# Altium PCB FLS ADC_A.PcbDoc (part 1 of 2)
Units mil, origin at the board's own origin, x right, y up, seen from the top; angles counter-clockwise.
Board outline 3421.65 x 2339.32 mil, 6 copper layers (Top Layer, Internal Plane 1, Mid-Layer 1, Mid-Layer 2, Internal Plane 2, Bottom Layer), stack 56.9 mil thick; 63 components, 71 nets, 345 pads, 98 vias.
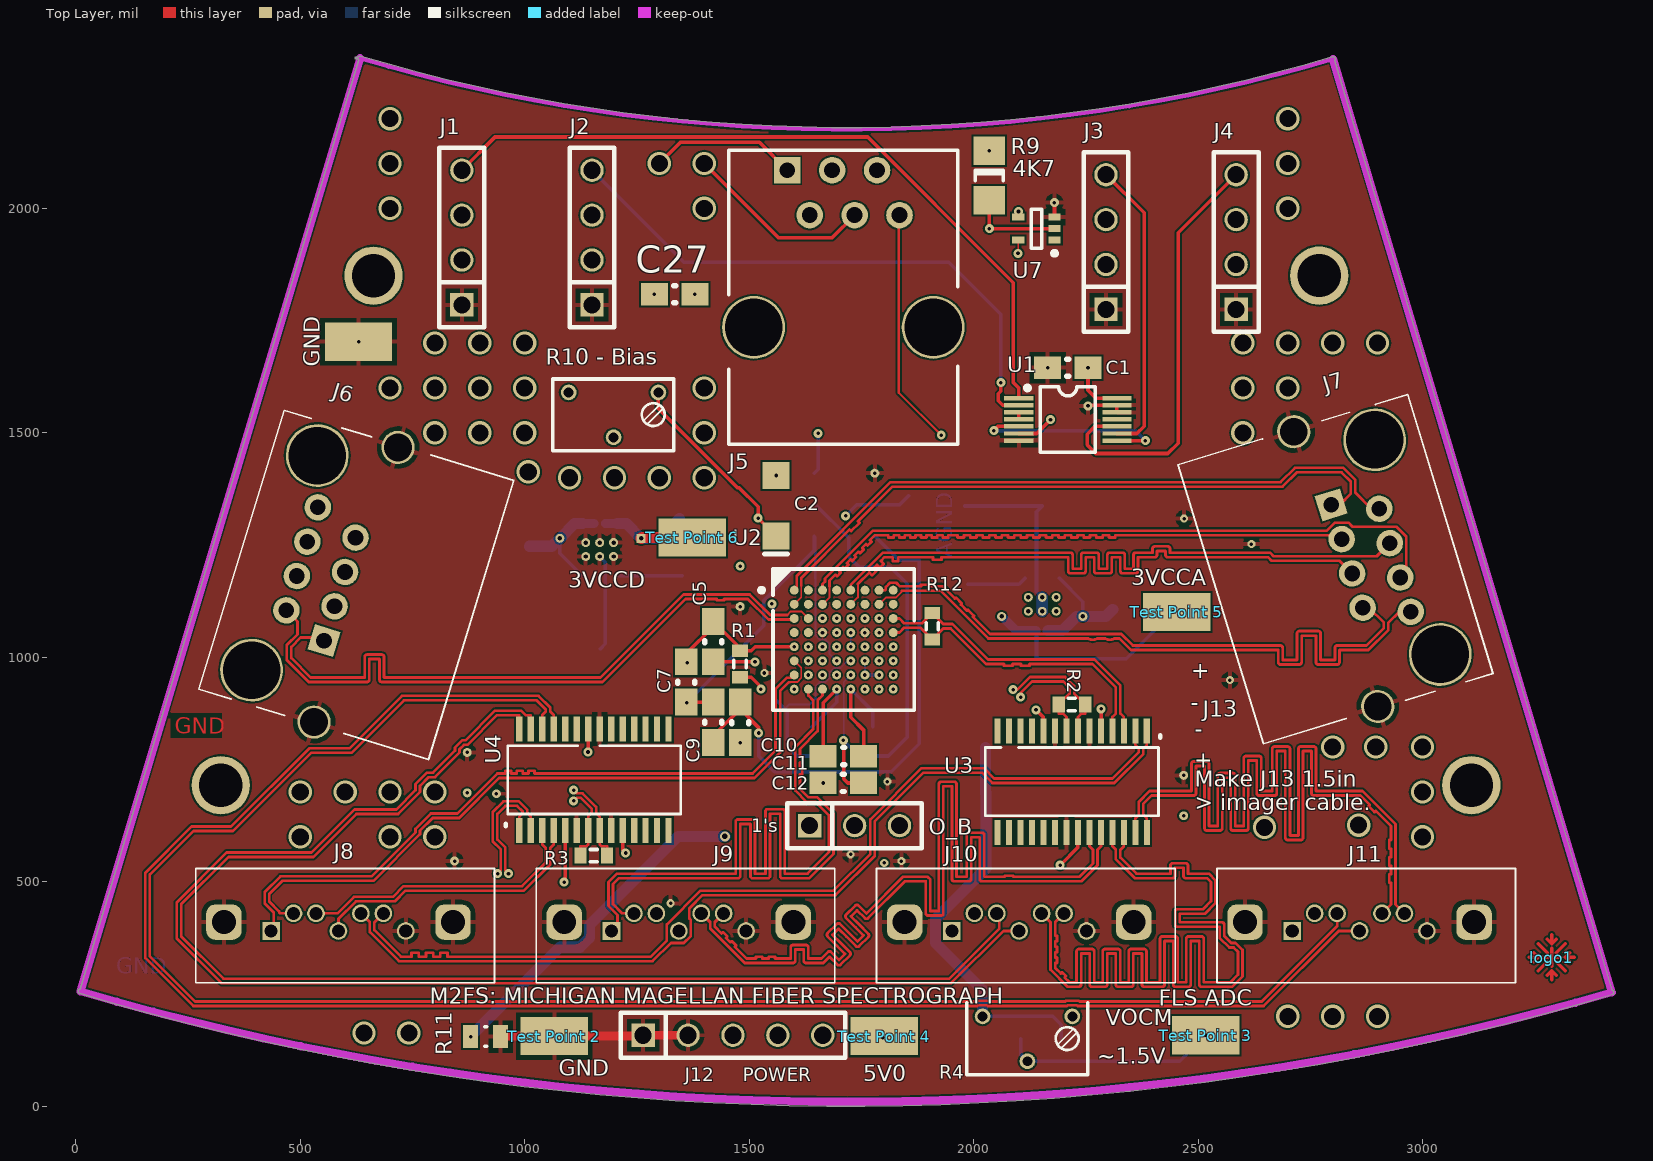
[diagram p0: Top Layer view]
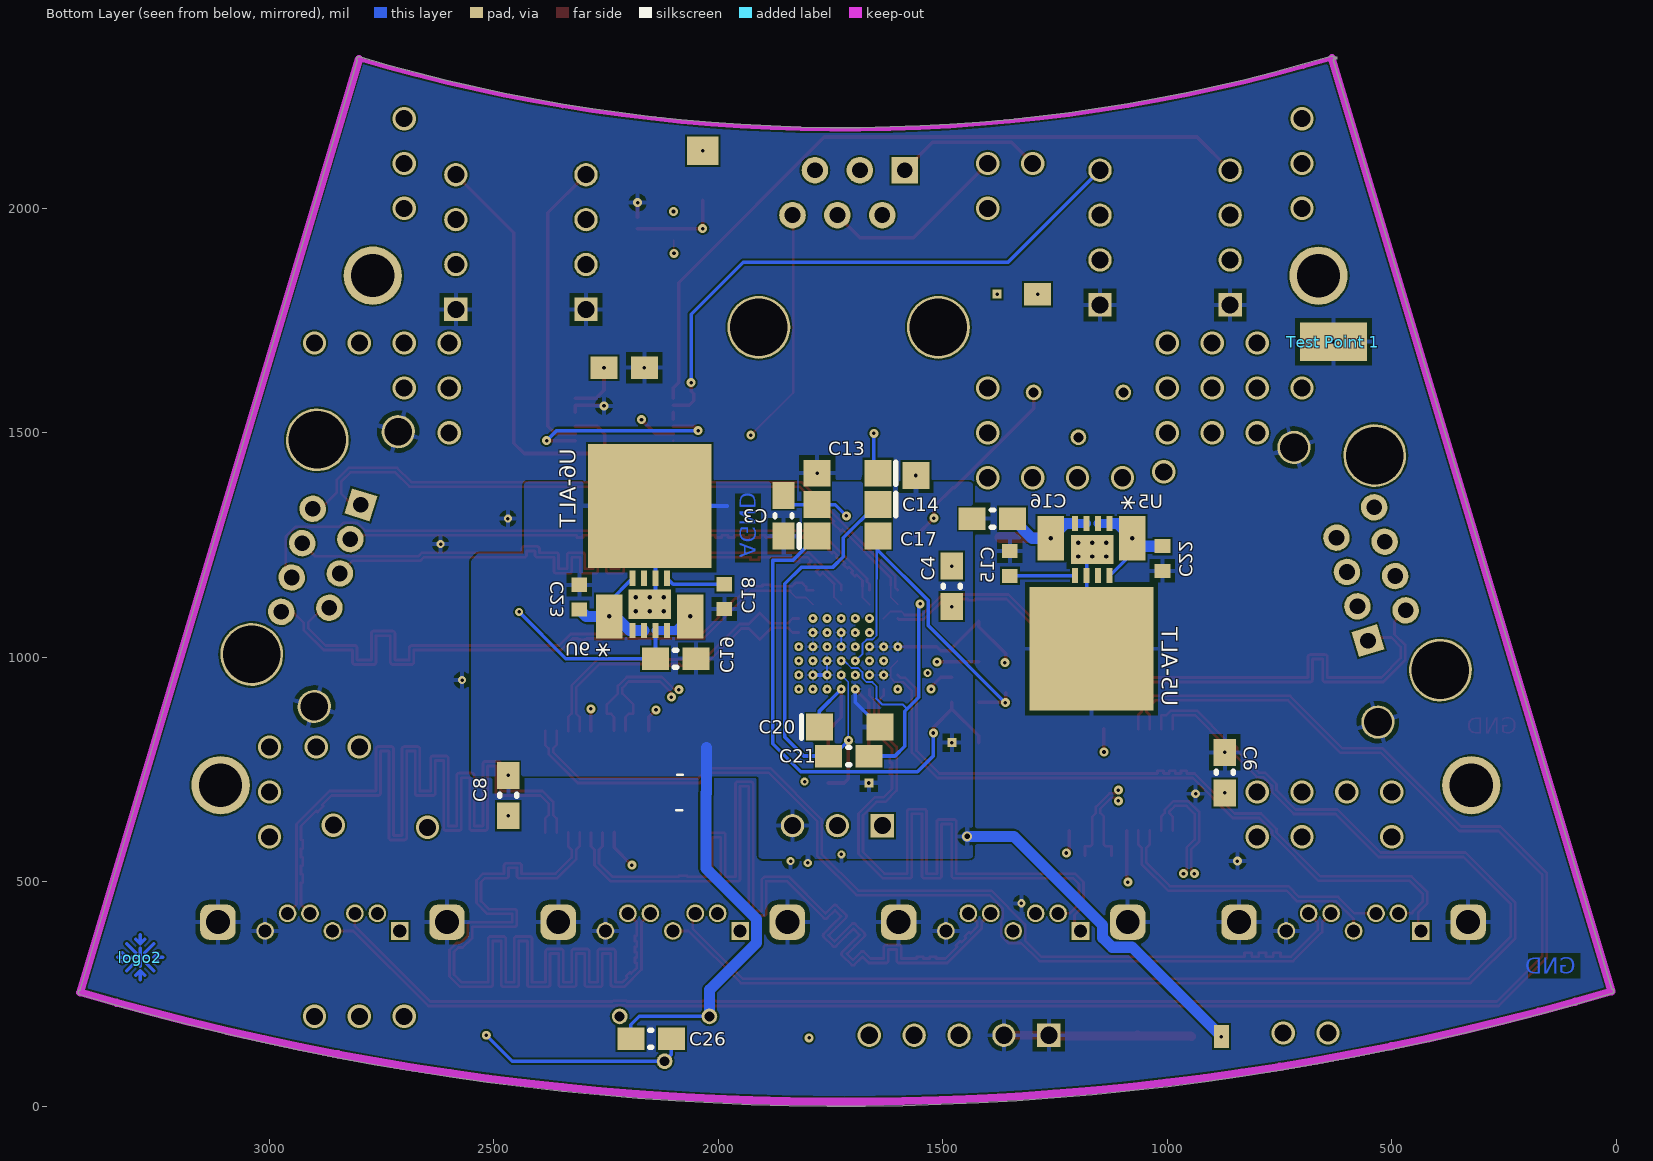
[diagram p1: Bottom Layer view, seen from below]
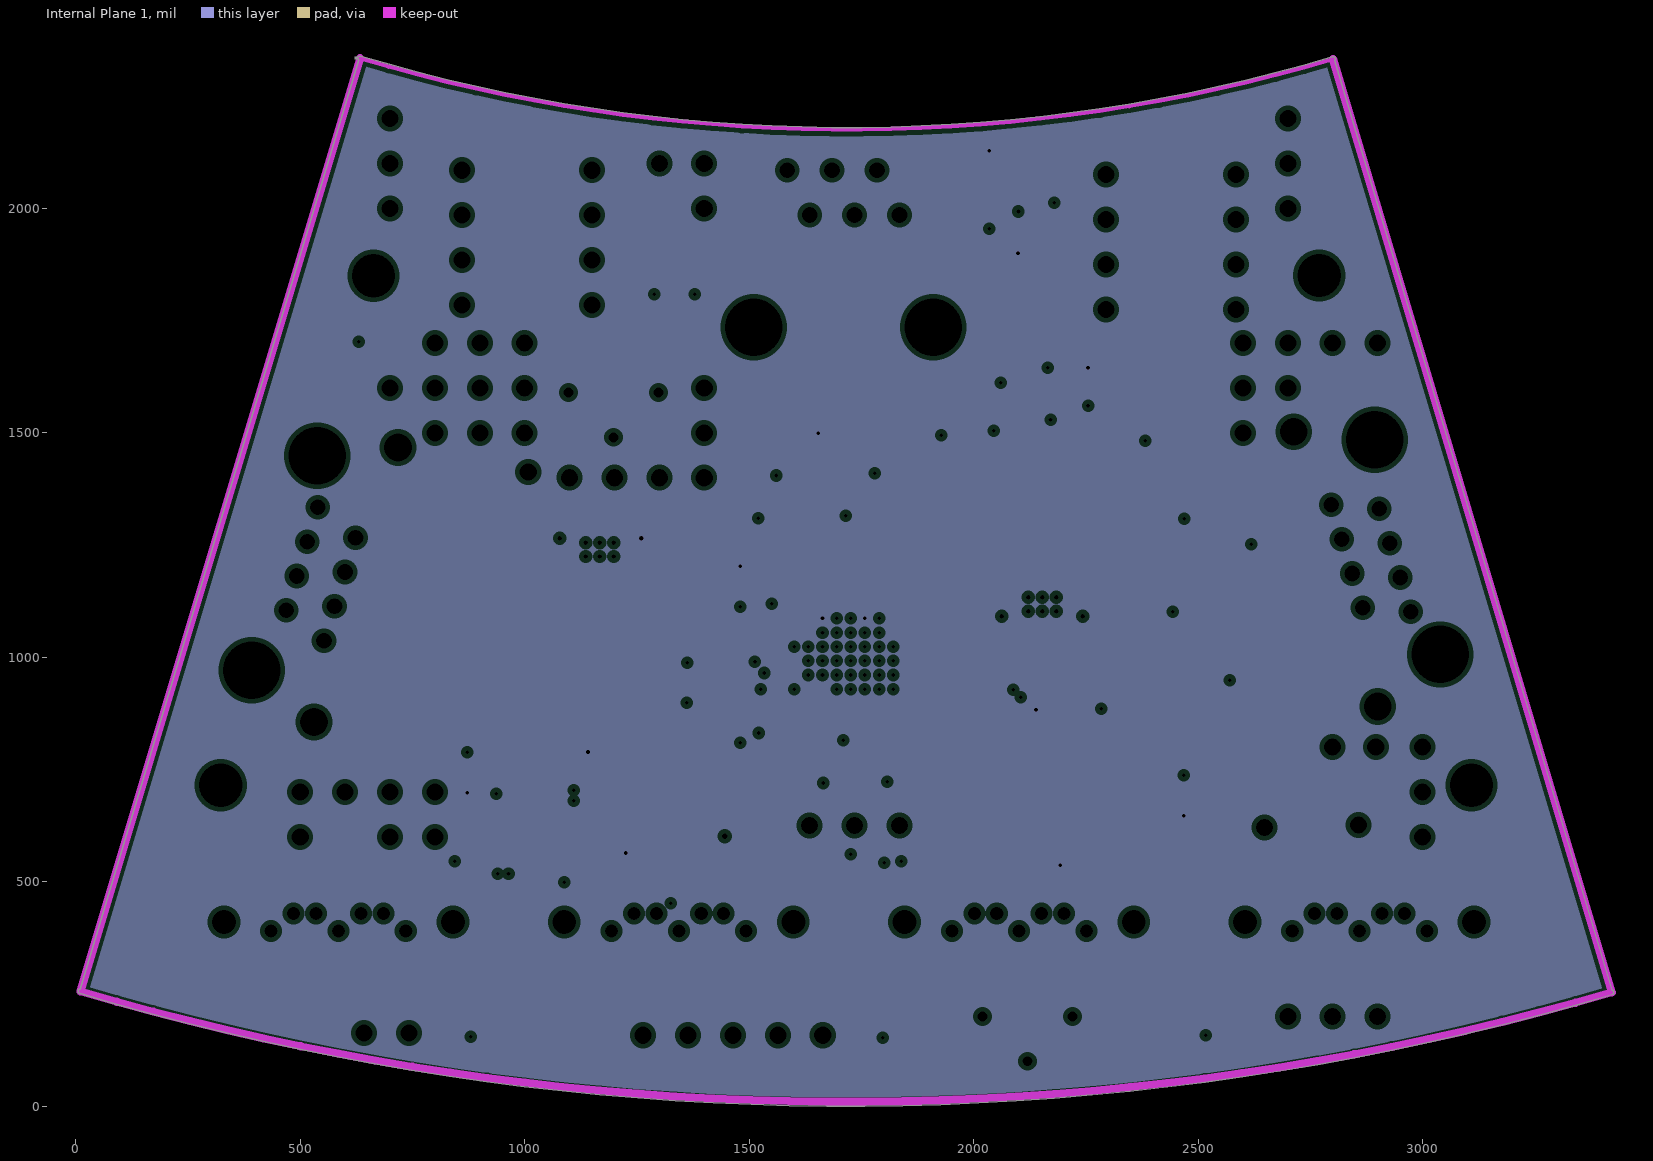
[diagram p2: Internal Plane 1, clearances drawn from the general rule]
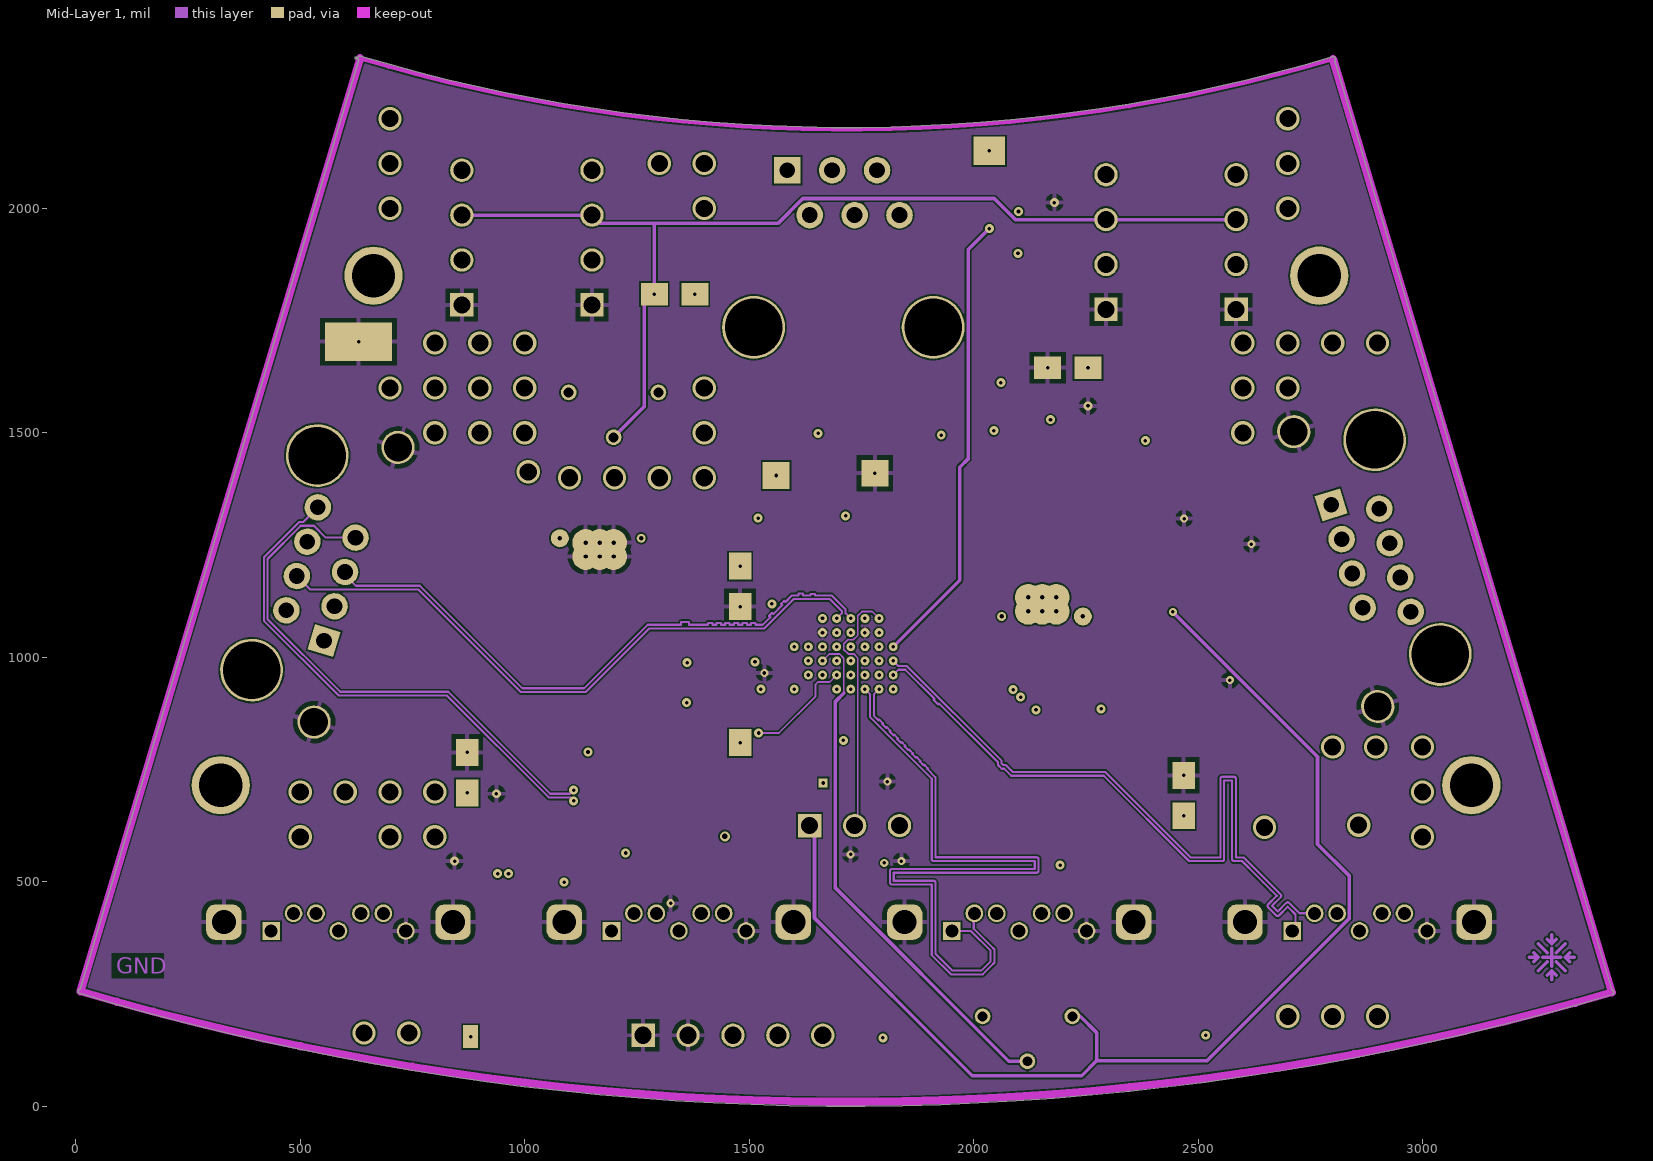
[diagram p3: Mid-Layer 1]
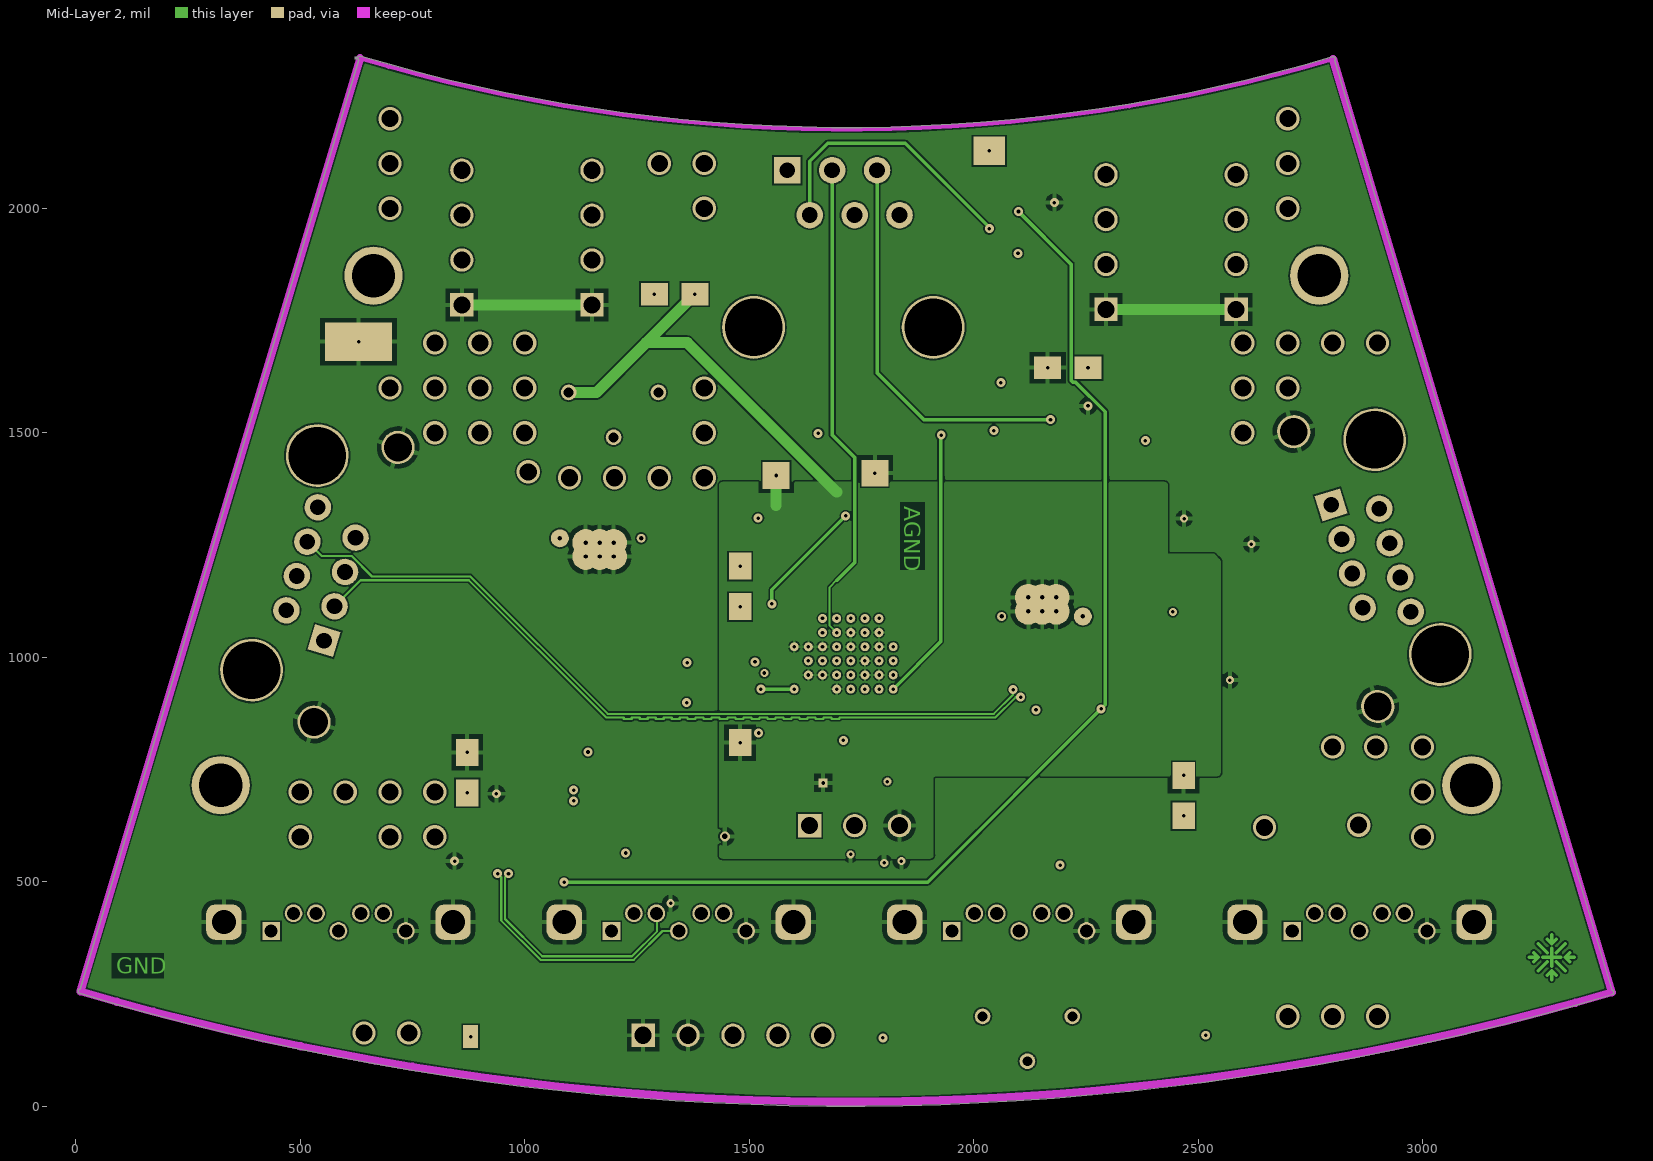
[diagram p4: Mid-Layer 2]
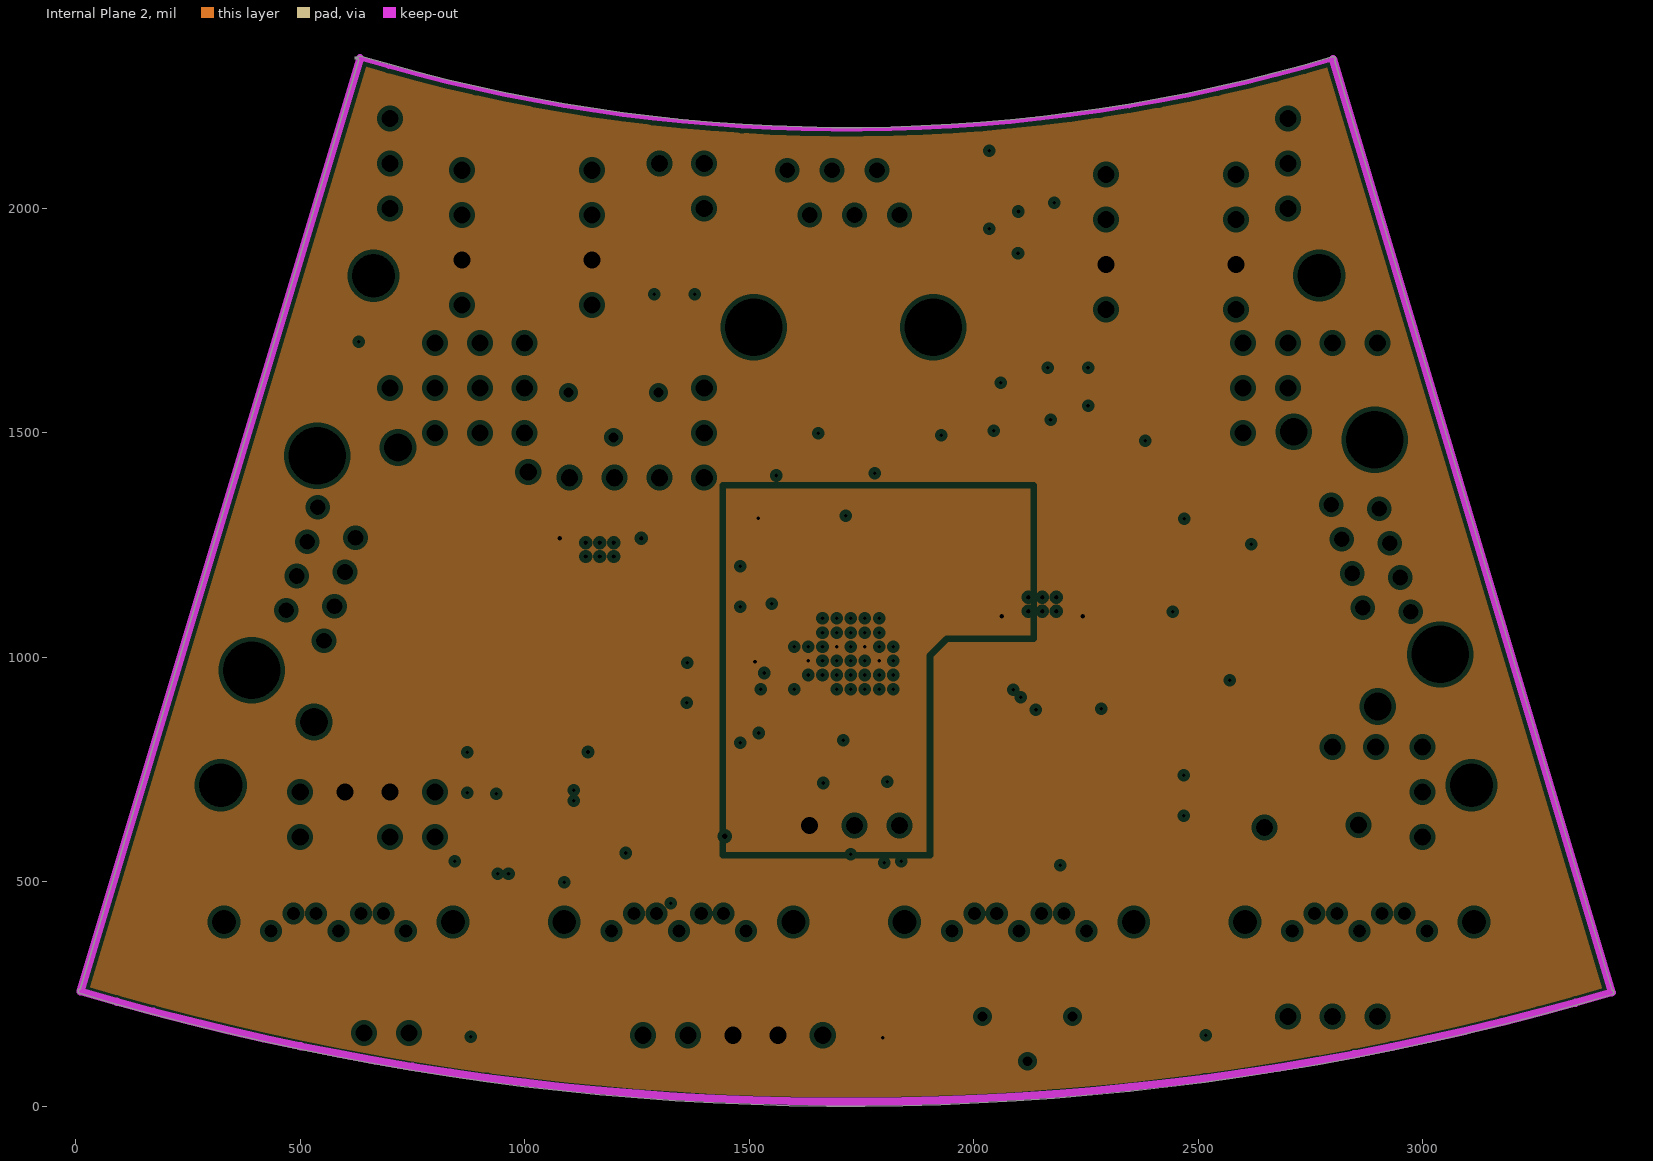
[diagram p5: Internal Plane 2, clearances drawn from the general rule]

## Layer stack, top to bottom
Top Layer: signal copper 1.4
Dielectric: prepreg 8.1, 2116 and 3313, Dk 4.2
Internal Plane 1: plane copper 0.7, net 3VCCD
Dielectric: core 13, FR-4, Dk 4.2
Mid-Layer 1: signal copper 0.7
Dielectric: prepreg 9.1, 2116, Dk 4.2
Mid-Layer 2: signal copper 0.7
Dielectric: core 13, FR-4, Dk 4.2
Internal Plane 2: plane copper 0.7, net (Multiple Nets)
Dielectric: prepreg 8.1, 2116 and 3313, Dk 4.2
Bottom Layer: signal copper 1.4

## Board outline
8.56,251.13 cw(c10,255.93) 9.71,260.94 630.24,2330.64 cw(c633.54,2334.42) 628.73,2333.02 624.13,2333.02 cw(c624.13,2335) 624.13,2336.98 629.24,2336.98 cw(c633.54,2334.42) 634.99,2339.22 ccw(c1719.72,5955) 2799.5,2337.74 cw(c2800.93,2332.93) 2805.95,2332.93 cw(c2800.93,2332.93) 2804.15,2329.09 3422.21,258.58 cw(c3421.63,253.6) 3426.65,253.6 cw(c3421.63,253.6) 3423.07,248.79 cw(c1719.72,5955)

## Design rules (kind name [scope] priority, off if disabled: settings)
AssemblyTestpoint [(IsPad And (OnTopLayer Or OnBottomLayer)) Or (IsVia) Or (IsPad And OnMultiLayer)] p1: testpointundercomponent=TRUE minsize=10 maxsize=100 preferedsize=60 minholesize=0 maxholesize=40 preferedholesize=32 testpointgrid=1 usegrid=TRUE gridtolerance=0.01 allowsidetop=TRUE allowsidebottom=TRUE
Clearance Clearance_1 [InComponent('U2')] p1: gap=3.5
Clearance Clearance_3 [OnLayer('Top Layer') or OnLayer('Bottom Layer')] p2: gap=4
Clearance [All] p3: gap=3.5
ComponentClearance [All vs InNet('FooBar')] p1: gap=10 collisioncheckmode=3 verticalgap=10 showdistances=FALSE
DiffPairsRouting [All] p1: maxlimit=10 minlimit=3.5 mostfreqgap=4 toplayer_mingap=4 midlayer1_prefgap=3.5 midlayer2_prefgap=3.5 bottomlayer_mingap=4 maxuncoupledlength=100
FabricationTestpoint [(IsPad And (OnTopLayer Or OnBottomLayer)) Or (IsVia) Or (IsPad And OnMultiLayer)] p1: side=3 testpointundercomponent=TRUE minsize=10 maxsize=100 preferedsize=60 minholesize=0 maxholesize=40 preferedholesize=32 testpointgrid=1 allowsidetop=TRUE allowsidebottom=TRUE usegrid=TRUE gridtolerance=0.01
HoleSize [All] p1: absolutevalues=TRUE maxlimit=150 minlimit=6 maxpercent=80.000 minpercent=20.000
HoleToHoleClearance [All] p1: gap=6 allowstackedmicrovias=TRUE
MatchedLengths MatchedLengths_2 [InNetClass('Match Lengths 2')] p1: tolerance=3 checknetsindiffpair=TRUE checkdiffpairvsdiffpair=TRUE checkothers=FALSE
MatchedLengths MatchedLengths_1 [InNetClass('Match Lengths 1')] p2: tolerance=10 checknetsindiffpair=TRUE checkdiffpairvsdiffpair=TRUE checkothers=FALSE
MatchedLengths [InNetClass('Match Lengths')] p3: tolerance=10 checknetsindiffpair=TRUE checkdiffpairvsdiffpair=TRUE checkothers=FALSE
MaximumViaCount [InNetClass('Differential')] p1: limit=1
MinimumAnnularRing [All] p1: minimumring=3
MinimumSolderMaskSliver [All] p1: minsoldermaskwidth=0.5
PlaneClearance [All] p1: clearance=10
PlaneConnect PlaneConnect_VCCD [(InNet('3VCCD') AND InComponent('U5'))] p1: planeconnectstyle=Relief reliefexpansion=8 reliefentries=4 reliefconductorwidth=6 reliefairgap=8
PlaneConnect PlaneConnect_3VCCA_U6 [(InNet('3VCCA') AND InComponent('U6'))] p2: planeconnectstyle=Relief reliefexpansion=8 reliefentries=4 reliefconductorwidth=6 reliefairgap=8
PlaneConnect PlaneConnect_U2 [HasFootprint('BGA80P8X8-64B')] p3: planeconnectstyle=Relief reliefexpansion=3 reliefentries=4 reliefconductorwidth=4 reliefairgap=3
PlaneConnect PlaneConnect_3VCCD [(InNet('3VCCD') AND HasFootprint('BGA80P8X8-64B'))] p4: planeconnectstyle=Relief reliefexpansion=2 reliefentries=4 reliefconductorwidth=4 reliefairgap=6
PlaneConnect "PlaneConnect General" [All] p5: planeconnectstyle=Relief reliefexpansion=20 reliefentries=4 reliefconductorwidth=10 reliefairgap=10
PolygonConnect PolygonConnect_BGA [HasFootprint('BGA80P8X8-64B')] p1: connectstyle=Relief reliefconductorwidth=6 reliefentries=4 polygonreliefangle="90 Angle" airgapwidth=3.2
PolygonConnect [All] p2: connectstyle=Relief reliefconductorwidth=10 reliefentries=4 polygonreliefangle="90 Angle" airgapwidth=10
RoutingVias [All] p1: holewidth=8 width=20 viastyle="Through Hole" minholewidth=8 minwidth=20 maxholewidth=28 maxwidth=50
ShortCircuit ShortCircuit_1 [InNet('AGND') vs InNet('GND')] p1: allowed=TRUE
SilkToSilkClearance [All] p1: silktosilkclearance=1
SilkscreenOverComponentPads [All] p1: minsilkscreentomaskgap=0.5
SolderMaskExpansion [All] p1: expansion=2
ViasUnderSMD [All] p1: allowed=TRUE
Width "Differential Width" [InNetClass('Differential')] p1: maxlimit=7 minlimit=3.5 preferedwidth=6.05 toplayer_minwidth=4 midlayer1_prefwidth=4.8 midlayer2_prefwidth=4.8 bottomlayer_minwidth=4 minimp=50.000000 maximp=85.000000 favimp=50.000000
Width [All] p2: maxlimit=50 minlimit=3.5 preferedwidth=5
16 further rules are at their usual default settings.

## Classes and differential pairs
component class "FLS ADC_ A": 1's C1 C2 C3 C4 C5 C7 C9 C10 C11 C12 C13 C14 C17 C20 C21 C26 C27 DSEL J1 J2 J3 J4 J5 J6 J7 J8 J9 J10 J11 logo1 logo2 R1 R2 R3 R4 R9 R10 R11 "Test Point 1" "Test Point 2" "Test Point 3" "Test Point 4" "Test Point 5" "Test Point 6" U1 U2 U7
component class PP1: C15 C16 C18 C19 C22 C23 J12 U5 U5-ALT U6 U6-ALT
component class MAX9153: C8 U4
net class Differential: DATA_CLK_OUT_A_N DATA_CLK_OUT_A_P FRAME_CLK_OUT_A_N FRAME_CLK_OUT_A_P LVDS_CHANNEL_1_N LVDS_CHANNEL_1_P LVDS_CHANNEL_2_N LVDS_CHANNEL_2_P LVDS_CHANNEL_3_N LVDS_CHANNEL_3_P LVDS_CHANNEL_4_N LVDS_CHANNEL_4_P START_A1_N START_A1_P START_A2_N START_A2_P START_A3_N START_A3_P START_A4_N START_A4_P START_A_N START_A_P SYS_CLK_A1_N SYS_CLK_A1_P SYS_CLK_A2_N SYS_CLK_A2_P SYS_CLK_A3_N SYS_CLK_A3_P SYS_CLK_A4_N SYS_CLK_A4_P SYS_CLK_A_N SYS_CLK_A_P SYS_CLK_ADC_A_N SYS_CLK_ADC_A_P "VIDEO A1_N" "VIDEO A1_P" "VIDEO A2_N" "VIDEO A2_P" "VIDEO A3_N" "VIDEO A3_P" "VIDEO A4_N" "VIDEO A4_P"
net class "Match Lengths": DATA_CLK_OUT_A_N DATA_CLK_OUT_A_P FRAME_CLK_OUT_A_N FRAME_CLK_OUT_A_P LVDS_CHANNEL_1_N LVDS_CHANNEL_1_P LVDS_CHANNEL_2_N LVDS_CHANNEL_2_P LVDS_CHANNEL_3_N LVDS_CHANNEL_3_P LVDS_CHANNEL_4_N LVDS_CHANNEL_4_P
net class "Match Lengths 2": "VIDEO A1_N" "VIDEO A1_P" "VIDEO A2_N" "VIDEO A2_P" "VIDEO A3_N" "VIDEO A3_P" "VIDEO A4_N" "VIDEO A4_P"
net class "Match Lengths 1": SYS_CLK_A1_N SYS_CLK_A1_P SYS_CLK_A2_N SYS_CLK_A2_P SYS_CLK_A3_N SYS_CLK_A3_P SYS_CLK_A4_N SYS_CLK_A4_P SYS_CLK_ADC_A_N SYS_CLK_ADC_A_P
differential pair class LVDS: DATA_CLK_OUT_A FRAME_CLK_OUT_A LVDS_CHANNEL_1 LVDS_CHANNEL_2 LVDS_CHANNEL_3 LVDS_CHANNEL_4
differential pair class VIDEO: "VIDEO A1" "VIDEO A2" "VIDEO A3" "VIDEO A4"
differential pair class CLOCK: SYS_CLK_A1 SYS_CLK_A2 SYS_CLK_A3 SYS_CLK_A4 SYS_CLK_ADC_A
differential pair "VIDEO A4": +"VIDEO A4_P" -"VIDEO A4_N"
differential pair "VIDEO A3": +"VIDEO A3_P" -"VIDEO A3_N"
differential pair "VIDEO A2": +"VIDEO A2_P" -"VIDEO A2_N"
differential pair "VIDEO A1": +"VIDEO A1_P" -"VIDEO A1_N"
differential pair SYS_CLK_A: +SYS_CLK_A_P -SYS_CLK_A_N
differential pair SYS_CLK_ADC_A: +SYS_CLK_ADC_A_P -SYS_CLK_ADC_A_N
differential pair SYS_CLK_A4: +SYS_CLK_A4_P -SYS_CLK_A4_N
differential pair SYS_CLK_A3: +SYS_CLK_A3_P -SYS_CLK_A3_N
differential pair SYS_CLK_A2: +SYS_CLK_A2_P -SYS_CLK_A2_N
differential pair SYS_CLK_A1: +SYS_CLK_A1_P -SYS_CLK_A1_N
differential pair START_A: +START_A_P -START_A_N
differential pair START_A4: +START_A4_P -START_A4_N
differential pair START_A3: +START_A3_P -START_A3_N
differential pair START_A2: +START_A2_P -START_A2_N
differential pair START_A1: +START_A1_P -START_A1_N
differential pair LVDS_CHANNEL_4: +LVDS_CHANNEL_4_P -LVDS_CHANNEL_4_N
differential pair LVDS_CHANNEL_3: +LVDS_CHANNEL_3_P -LVDS_CHANNEL_3_N
differential pair LVDS_CHANNEL_2: +LVDS_CHANNEL_2_P -LVDS_CHANNEL_2_N
differential pair LVDS_CHANNEL_1: +LVDS_CHANNEL_1_P -LVDS_CHANNEL_1_N
differential pair FRAME_CLK_OUT_A: +FRAME_CLK_OUT_A_P -FRAME_CLK_OUT_A_N
differential pair DATA_CLK_OUT_A: +DATA_CLK_OUT_A_P -DATA_CLK_OUT_A_N

## Components (designator, comment, footprint, x,y, rotation, side; value= is the part's Value field where it differs from the comment)
1's "SW-SPDT" SIP3 1635,625 r0 top locked
C1 "0.1uF" "0805 slim"#1 2165,1645 r0 top locked
C2 "10uF" 1206#1 1560,1270 r90 top locked
C3 "0.1uF" "0805 slim"#2 1855,1360 r270 bottom locked
C4 "0.1uF" "0805 slim"#3 1480,1203 r270 bottom locked
C5 "0.1uF" "0805 slim"#2 1420,990 r90 top locked
C6 "0.1uF" "0805 slim"#3 872,788 r270 bottom
C7 "0.1uF" "0805 slim"#2 1360,900 r90 top locked
C8 "0.1uF" "0805 slim"#3 2468,737 r270 bottom
C9 "0.1uF" "0805 slim"#2 1420,900 r270 top locked
C10 "0.1uF" "0805 slim"#4 1480,810 r90 top locked
C11 "0.1uF" "0805 slim"#2 1755,780 r180 top locked
C12 "0.1uF" "0805 slim"#5 1665,720 r0 top locked
C13 "10uF" 1206#2 1645,1410 r0 bottom locked
C14 "10uF" 1206#3 1645,1340 r0 bottom locked
C15 "0.1uF" 1608[0603] 1351,1209 r90 bottom
C16 "0.1uF" "0805 slim outer" 1345,1309 r0 bottom
C17 "10uF" 1206#3 1780,1270 r180 bottom locked
C18 "0.1uF" 1608[0603] 1987,1135 r270 bottom
C19 "0.1uF" "0805 slim outer" 2140,997 r180 bottom
C20 "10uF" 1206#3 1775,845 r180 bottom locked
C21 "0.1uF" "0805 slim"#2 1665,780 r0 bottom locked
C22 "0.1uF" 1608[0603] 1011,1220 r90 bottom
C23 "0.1uF" 1608[0603] 2310,1134 r270 bottom
C26 "0.1uF" "0805 slim"#2 2195,150 r180 bottom locked
C27 "0.1uF" "0805 slim"#6 1379,1809 r180 top
J1 "CON4" SIP4 860,1785 r90 top locked
J2 "CON4" SIP4 1150,1785 r90 top locked
J3 "CON4" SIP4 2295,1775 r90 top locked
J4 "CON4" SIP4 2585,1775 r90 top locked
J5 "RJ-11" "RJ11 - VERTICAL" 1510,1735 r0 top locked
J6 "RJ45 - JACK" "RJ45 VERTICAL SINGLE" 391.74,971.28 r253 top locked
J7 "RJ45 - JACK" "RJ45 VERTICAL SINGLE" 2893.5,1484.4 r107 top locked
J8 "SATA PLUG 7POS" "MOLEX 471554001" 330,410 r0 top locked
J9 "SATA PLUG 7POS" "MOLEX 471554001" 1088.25,410 r0 top locked
J10 "SATA PLUG 7POS" "MOLEX 471554001" 1846.51,410 r0 top locked
J11 "SATA PLUG 7POS" "MOLEX 471554001" 2604.76,410 r0 top locked
J12 "POWER" SIP5 1264,158 r0 top
logo1 "starflake" STARFLAKE 3288,332 r0 top locked
logo2 "starflake" STARFLAKE 3288,332 r180 bottom locked
R1 "100" J1-0603 1480,985 r270 top locked
R2 "100" J1-0603 2219,895 r0 top
R3 "100" J1-0603 1154,558 r180 top locked
R4 "10K" V1240W 2020,200 r0 top locked
R9 "4K7" 1206#4 2035,2073 r270 top locked
"R10 - Bias" "10K" V1240W 1098,1590 r0 top (schematic designator R10)
R11 "Jumper 0805(2012)" RESC0805(2012)_L 913,155 r0 top
R12 "100" J1-0603 1908,1069 r90 top
"Test Point 1" "TP-107" TP-107#1 635,1678 r0 bottom
"Test Point 2" "TP-107" TP-107#2 1061,131 r180 top
"Test Point 3" "TP-107" TP-107#3 2512,133 r180 top
"Test Point 4" "TP-107" TP-107#2 1796,131 r180 top
"Test Point 5" "TP-107" TP-107#2 2458,1126 r0 top
"Test Point 6" "TP-107" TP-107#2 1368,1242 r180 top
U1 "SN74AHC08BQ" DGV014 2210,1530 r270 top locked
U2 "AD9289" BGA80P8X8-64B 1710.75,1039.25 r0 top locked
U3 "MAX9153" MAX9153EUI 2386,836 r90 top locked
U4 "MAX9153" MAX9153EUI 988,614 r270 top locked
U5 "TPS79630_DRB8" DRB8_2P4X1P65 1167,1240 r270 bottom
U5-ALT "BA30BC0T" TO252-3#1 1169,1019 r0 bottom
U6 "TPS79630_DRB8" DRB8_2P4X1P65 2153,1118 r90 bottom
U6-ALT "BA30BC0T" TO252-3#2 2153,1337 r180 bottom
U7 "MC74VHC1G04DFT2G" 419A-01_N 2140,1955 r180 top locked

## Footprints (in the part's own frame and the unit in brackets; to place one, negate y for a bottom-side part, rotate by r counter-clockwise, add the part's x,y. Pads: shape width x height; smd on the part's side, far side on the other; paste and mask are expansions set on the pad)
419A-01_N [mm] "SOT353, 5-Leads, Body 2x1.3mm, Pitch 0.65mm, Lead Span 2.1mm, IPC Medium Density"
  rect 0.7x0.4 smd: 1(-1.025,0.65) 2(-1.025,0) 3(-1.025,-0.65) 4(1.025,-0.65) 5(1.025,0.65)
  silkscreen extent -1.15,-1.1 0.3,1.52, body extent -0.7,-1.1 0.7,1.1, height 1.1
"0805 slim"#1 [mil]
  rect 60x50 hole 8: 1(0,0) 2(90,0)
  silkscreen extent 42,-19 47,19
"0805 slim"#2 [mil]
  rect 60x50 smd: 1(0,0) 2(90,0)
  silkscreen extent 42,-19 47,19
"0805 slim"#3 [mil]
  rect 60x50 / inner rect 60x50 / far side round 20 hole 8: 1(0,0) 2(90,0)
  silkscreen extent 42,-19 47,19
"0805 slim"#4 [mil]
  rect 60x50 / inner rect 60x50 / far side rect 20x20 hole 8: 1(0,0)
  rect 60x50 smd: 2(90,0)
  silkscreen extent 42,-19 47,19
"0805 slim"#5 [mil]
  rect 60x50 / inner rect 20x20 / far side rect 20x20 hole 8: 1(0,0)
  rect 60x50 smd: 2(90,0)
  silkscreen extent 42,-19 47,19
"0805 slim"#6 [mil]
  rect 60x50 / inner rect 60x50 / far side rect 20x20 hole 8: 1(0,0)
  rect 60x50 hole 8: 2(90,0)
  silkscreen extent 42,-19 47,19
"0805 slim outer" [mil]
  rect 60x50 smd: 1(0,0) 2(90,0)
  silkscreen extent 42,-19 47,19
1206#1 [mil]
  rect 60x60 smd: 1(0,0)
  rect 60x60 hole 8: 2(135,0)
  silkscreen extent -40,-25 -40,25
1206#2 [mil]
  rect 60x60 smd: 1(0,0)
  rect 60x60 / inner rect 60x60 / far side round 20 hole 8: 2(135,0)
  silkscreen extent -40,-25 -40,25
1206#3 [mil]
  rect 60x60 smd: 1(0,0) 2(135,0)
  silkscreen extent -40,-25 -40,25
1206#4 [mil] "Chip Capacitor; Body 3.2 x 1.6 mm (LxW typ)"
  rect 62.99x70.87 hole 8: 1(-55.12,0)
  rect 62.99x70.87 smd: 2(55.12,0)
  silkscreen extent -12,-31 12,31
1608[0603] [mm] "Chip Capacitor, Body 1.6x0.8mm, IPC High Density"
  rect 0.8x0.9 smd: 1(-0.7,0) 2(0.7,0)
  body extent -0.87,-0.48 0.87,0.48, height 1.3
BGA80P8X8-64B [mil] "BGA, 64-Leads, Body 8x8mm, Pitch 0.8mm"
  round 20 smd: A1(-110.24,110.24) A2(-78.74,110.24) A3(-47.24,110.24) A4(-15.75,110.24) A5(15.75,110.24) A6(47.24,110.24) A7(78.74,110.24) A8(110.24,110.24) B1(-110.24,78.74) B2(-78.74,78.74) B3(-47.24,78.74) B4(-15.75,78.74) B5(15.75,78.74) B6(47.24,78.74) B7(78.74,78.74) B8(110.24,78.74) C1(-110.24,47.24) C2(-78.74,47.24) C8(110.24,47.24) D1(-110.24,15.75) D2(-78.74,15.75) D8(110.24,15.75) F1(-110.24,-47.24) G1(-110.24,-78.74) H2(-78.74,-110.24) H3(-47.24,-110.24)
  round 20 hole 8: C3(-47.24,47.24) C4(-15.75,47.24) C5(15.75,47.24) C6(47.24,47.24) C7(78.74,47.24) D3(-47.24,15.75) D4(-15.75,15.75) D5(15.75,15.75) D6(47.24,15.75) D7(78.74,15.75) E1(-110.24,-15.75) E2(-78.74,-15.75) E3(-47.24,-15.75) E4(-15.75,-15.75) E5(15.75,-15.75) E6(47.24,-15.75) E7(78.74,-15.75) E8(110.24,-15.75) F2(-78.74,-47.24) F3(-47.24,-47.24) F4(-15.75,-47.24) F5(15.75,-47.24) F6(47.24,-47.24) F7(78.74,-47.24) F8(110.24,-47.24) G2(-78.74,-78.74) G3(-47.24,-78.74) G4(-15.75,-78.74) G5(15.75,-78.74) G6(47.24,-78.74) G7(78.74,-78.74) G8(110.24,-78.74) H1(-110.24,-110.24) H4(-15.75,-110.24) H5(15.75,-110.24) H6(47.24,-110.24) H7(78.74,-110.24) H8(110.24,-110.24)
  silkscreen extent -188,-157 157,157, body extent -157,-157 157,157, height 43
DGV014 [mm] "Shrink Small Outline; 14 Leads; Body Width 4.4 mm; Pitch 0.4 mm"
  rect 0.25x1.65 smd: 1(-1.2,-2.775) 2(-0.8,-2.775) 3(-0.4,-2.775) 4(0,-2.775) 5(0.4,-2.775) 6(0.8,-2.775) 7(1.2,-2.775) 8(1.2,2.775) 9(0.8,2.775) 10(0.4,2.775) 11(0,2.775) 12(-0.4,2.775) 13(-0.8,2.775) 14(-1.2,2.775)
  silkscreen extent -1.9,-2.41 1.85,1.55
DRB8_2P4X1P65 [mm]
  rect 0.85x0.35 smd paste-0.412: 1(-1.475,0.975) 2(-1.475,0.325) 3(-1.475,-0.325) 4(-1.475,-0.975) 5(1.475,-0.975) 6(1.475,-0.325) 7(1.475,0.325) 8(1.475,0.975)
  rect 1.65x2.4 smd paste-1.187 mask-1.187: 9(0,0)
  round 0.508 / inner round 1.524 / far side round 0.508 hole 0.254: V_1(0.394,0.787) V_2(-0.394,0) V_3(-0.394,-0.787) V_4(-0.394,0.787) V_5(0.394,-0.787) V_6(0.394,0)
  Top Layer region: 0,-1.2 0,-1.2 0,-1.2 0,-1.2 0,-1.2 0,-1.2 0,-1.2 0,-1.2
J1-0603 [mm] "Chip Resistor, Body 1.6x0.8mm, IPC High Density"
  rect 0.7x0.9 smd: 1(-0.75,0) 2(0.75,0)
  silkscreen extent -0.2,-0.35 0.2,0.35, body extent -0.85,-0.48 0.85,0.48, height 0.9
MAX9153EUI [mm]
  rect 1.4x0.35 smd: 1(0,0) 2(0,0.65) 3(0,1.3) 4(0,1.95) 5(0,2.6) 6(0,3.25) 7(0,3.9) 8(0,4.55) 9(0,5.2) 10(0,5.85) 11(0,6.5) 12(0,7.15) 13(0,7.8) 14(0,8.45) 15(-5.75,8.45) 16(-5.75,7.8) 17(-5.75,7.15) 18(-5.75,6.5) 19(-5.75,5.85) 20(-5.75,5.2) 21(-5.75,4.55) 22(-5.75,3.9) 23(-5.75,3.25) 24(-5.75,2.6) 25(-5.75,1.95) 26(-5.75,1.3) 27(-5.75,0.65) 28(-5.75,0)
  silkscreen extent -4.8,-0.76 -0.25,9.14
"MOLEX 471554001" [mm] "CONN SATA HDR 7POS PCB VERT"
  rect 1x1 hole 0.74: 1(2.67,-0.5)
  round 1 hole 0.74: 2(3.94,0.5) 3(5.21,0.5) 4(6.48,-0.5) 5(7.75,0.5) 6(9.02,0.5) 7(10.29,-0.5)
  rrect50% 2x2 hole 1.35: 8(0,0) 9(12.96,0)
  silkscreen extent -1.59,-3.43 15.31,3.03, body extent -1.64,-3.48 15.36,3.08, height 18.14
RESC0805(2012)_L [mm] "Chip Resistor, Body 2.0x1.3mm, IPC High Density"
  rect 0.85x1.3 hole 0.203: 1(-0.85,0)
  rect 0.85x1.3 smd: 2(0.85,0)
  silkscreen extent -0.05,-0.55 0.05,0.55, body extent -1.1,-0.67 1.1,0.68, height 0.7
"RJ11 - VERTICAL" [mm] "TE Connectivity 5520258-3"
  rect 1.5x1.5 hole 0.9: 1(1.905,8.89)
  round 1.5 hole 0.9: 2(3.175,6.35) 3(4.445,8.89) 4(5.715,6.35) 5(6.985,8.89) 6(8.255,6.35)
  round 3.556 hole 3.251 unplated: MH1(0,0) MH2(10.16,0)
  silkscreen extent -1.4,-6.6 11.56,10.03, body extent -1.5,-6.7 11.66,10.13, height 0.01
"RJ45 VERTICAL SINGLE" [mil] "RJHSE-3380"
  rect 59.05x59.05 hole 35: 1(-110,135)
  round 59.05 hole 35: 2(-150,35) 3(-190,135) 4(-230,35) 5(-270,135) 6(-310,35) 7(-350,135) 8(-390,35)
  round 140 hole 128 unplated: MH1(-500,0) MH2(0,0)
  round 74 hole 62: MH3(-570,167) MH4(70,167)
  silkscreen extent -575,-100 75,435, body extent -577,-102 77,437, height 625
SIP3 [mil] "SIP Header"
  rect 52x52 hole 38: 1(0,0)
  round 52 hole 38: 2(100,0) 3(200,0)
  silkscreen extent -50,-50 250,50
SIP4 [mil]
  rect 52x52 hole 38: 1(0,0)
  round 52 hole 38: 2(100,0) 3(200,0) 4(300,0)
  silkscreen extent -50,-50 350,50, body extent -55,-55 355,55, height 714
SIP5 [mil]
  rect 52x52 hole 38: 1(0,0)
  round 52 hole 38: 2(100,0) 3(200,0) 4(300,0) 5(400,0)
  silkscreen extent -50,-50 450,50, body extent -55,-55 455,55, height 250
STARFLAKE [mil]
  Multi-Layer lines w8: -50,0 -30,0 ; -40,-10 -30,0 ; -40,10 -30,0 ; -30,-30 -10,-10 ; -30,30 -10,10 ; -20,0 0,0 ; -10,-40 0,-30 ; -10,40 0,30 ; 0,-50 0,-30 ; 0,-20 0,0 ; 0,20 0,0 ; 0,50 0,30 ; 10,-40 0,-30 ; 10,-10 30,-30 ; 10,10 30,30 ; 10,40 0,30 ; 20,0 0,0 ; 40,-10 30,0 ; 40,10 30,0 ; 50,0 30,0
TO252-3#1 [mil] "Rohm TO252-3"
  rect 59.06x98.43 / inner round 40 / far side round 20 hole 10: 1(-90.55,-246.06)
  rect 59.06x98.43 / inner round 20 / far side rect 20x20 hole 10: 3(90.55,-246.06)
  rect 275.59x275.59 smd: FIN(0,0)
TO252-3#2 [mil] "Rohm TO252-3"
  rect 59.06x98.43 / inner round 40 / far side round 20 hole 10: 1(-90.55,-246.06)
  rect 59.06x98.43 / inner round 20 / far side round 20 hole 10: 3(90.55,-246.06)
  rect 275.59x275.59 smd: FIN(0,0)
TP-107#1 [mil]
  rect 150x85 hole 8: 1(-5,-25)
TP-107#2 [mil]
  rect 150x85 smd: 1(-5,-25)
TP-107#3 [mil]
  rect 150x85 / inner round 20 / far side round 20 hole 8: 1(-5,-25)
V1240W [mil]
  round 35 hole 22: CCW(200,0) CW(0,0) W(100,-100)
  silkscreen extent -35,-130 234,30, body extent -39,-134 238,34

## Part data
1's: library part TP3
C1 C3 C4 C5 C6 C7 C8 C9 C10 C11 C12 C15 C16 C18 C19 C21 C22 C23 C26 C27: library part Cap, "Capacitor"
C2 C13 C14 C17 C20: library part "Cap Pol3", "Polarized Capacitor (Surface Mount)"
J5: "RJ-11 6-PIN CONNECTOR"
J12: library part CON5
R1 R2 R3 R9 R12: library part Res1, "Resistor"
R4 "R10 - Bias": library part POT1
R11: library part CMP-1013-00001-1, "Jumper 0805 (2012 Metric)"
U1: library part SN74AHC08DBLE, "Quadruple 2-Input Positive-AND Gate"
U5 U6: "Imported"
U7: library part MC74VHC1G04DFT1, "Inverter"

## Free pads (board coordinates)
  round 130 hole 96 mask+0: 1(322.92,715) 2(663.21,1850) 3(2770,1850.31) 4(3108.9,715)

## Via types
v1: diameter 52, hole 38, Top Layer to Bottom Layer, 52 vias
v2: diameter 20, hole 8, Top Layer to Bottom Layer, 35 vias
v3: diameter 18, hole 8, Top Layer to Bottom Layer, 10 vias
v4: diameter 22, hole 12, Top Layer to Bottom Layer, 1 vias

## Nets (pads, with @x,y where several pads share a name; then routed paths per layer and width w, separated by ;. In a path a pad name is that pad's centre, name@x,y a point inside that pad or via, vN(x,y) a via of type N, cw(c..) or ccw(c..) an arc to the next point about the centre after c; other vN are vias at no path point)
3VCCA: 1's.1 "R10 - Bias.CCW" "Test Point 5.1" C2.1 C5.1 C19.1 R4.CCW U2.E4 U2.E6 U2.F2 U2.F7 U6-ALT.3 U6.3 U6.4 | length 3694.7
  Top Layer w8: 1298,1590 1298,1553.92 1473.92,1378 1477.46,1378 1520,1335.46 v2(1520,1310) C2.1@1560,1270 ; C5.1@1420,990 v2(1513,990)
  Mid-Layer 1 w8: 1's.1@1635,625 1645.61,614.39 1645.61,419.39 1997,68 2241,68 2274,101 ; R4.CCW@2220,200 2238,200 2274,164 2274,101 ; v3(2444,1101) 2766.25,778.75 2766.25,583.75 2837.32,512.68 2837.32,418.32 2519.99,101 2274,101
  Mid-Layer 2 w4: U2.E6@1756.59,1023.5 U2.E6@1757.99,1023.5
  Bottom Layer w8: U6.3@2140.2,1059.93 2140.2,997.2 C19.1@2140,997 2340,997 v3(2444,1101)
  Bottom Layer w20: U6-ALT.3@2062.45,1090.94 2093.46,1059.93 U6.4@2114.61,1059.93 U6.3@2139.3,1059.93
3VCCA/2: "Test Point 3.1" C26.2 R4.W U2.F3 | length 1641.4
  Mid-Layer 1 w4: U2.F3@1663.5,992.01 1679,1007.51 1701.42,1007.51 1711,997.93 1711,922.6 1712.16,921.43
  Mid-Layer 1 w8: 1710.75,920.02 1692.25,901.52 1692.25,486.09 2078.34,100 R4.W@2120,100
  Bottom Layer w8: C26.2@2105,150 2105,115 R4.W@2120,100 2459,100 2517,158
3VCCD: "Test Point 6.1" C1.2 C4.1 C6.2 C8.2 C13.1 C16.1 R9.1 U1.14 U2.C3 U2.C6 U3.10 U3.22 U4.10 U4.22 U5-ALT.3 U5.3 U5.4 U7.5 | length 801.8
  Top Layer w4: v2(2099,1900) 2099.65,1900.65 U7.5@2099.65,1929.41
  Top Layer w8: v2@1140.98,789.69 1141.54,790.24 U4.22@1141.54,840.38 ; U4.10@1218.32,614 1218.32,570.68 v2(1225,564) ; v2(2139,883) 2155.69,866.31 U3.10@2155.69,836 ; v2(2193,537) 2232.46,576.46 U3.22@2232.46,609.62 ; C1.2@2255,1645 2255,1594.96 2272.72,1577.24 U1.14@2319.25,1577.24
  Top Layer w25: U5-ALT.3@1259.55,1265.06 1261.49,1267 1373,1267
  Bottom Layer w8: C13.1@1645,1410 1653.72,1418.72 v2(1653.72,1499)
  Bottom Layer w20: U5.3@1179.8,1298.07 U5.4@1205.39,1298.07
  Bottom Layer w25: U5.4@1205.39,1298.07 1226.54,1298.07 U5-ALT.3@1259.55,1265.06 1301.06,1265.06 C16.1@1345,1309
  other v2: 1141,789
5V0: "Test Point 4.1" C22.2 C23.2 J1.2 J2.2 J3.2 J4.2 J12.3 J12.4 U5-ALT.1 U5.1 U5.2 U5.8 U6-ALT.1 U6.1 U6.2 U6.8 | length 538.3
  Bottom Layer w8: U5-ALT.1@1078.45,1265.06 1078.45,1232.09 U5.8@1128.61,1181.93 ; U6.8@2191.39,1176.07 2243.55,1123.91 U6-ALT.1@2243.55,1090.94
  Bottom Layer w20: U5.1@1128.61,1298.07 U5.2@1154.2,1298.07
  Bottom Layer w25: C22.2@1011,1247.56 1060.94,1247.56 U5-ALT.1@1078.45,1265.06 1111.46,1298.07 U5.1@1128.61,1298.07 ; U6.2@2165.8,1059.93 U6.1@2191.39,1059.93 2197.99,1059.93 2229,1090.94 U6-ALT.1@2243.55,1090.94 2294.5,1090.94 C23.2@2310,1106.44
  other v1: 600,700 700,700
  other v2: 1798,152
AGND: 1's.3 "R10 - Bias.CW" C2.2 C3.2 C5.2 C7.2 C10.1 C11.2 C12.1 C18.2 C19.2 C20.2 C23.1 C26.1 C27.1 R1.1 R4.CW R11.1 U2.D5 U2.D7 U2.E1 U2.E2 U2.E3 U2.E5 U2.E7 U2.F6 U2.G2 U2.G3 U2.G6 U2.G7 U2.H4 U6-ALT.FIN U6.6 U6.9 U6.V_1 U6.V_2 U6.V_3 U6.V_4 U6.V_5 U6.V_6 | length 3784.8
  Top Layer w8: C7.2@1360,990 1360,1008.34 1420,1068.34 C5.2@1420,1080 1480,1020 R1.1@1480,1014.53 1504.72,1014.53 1513.7,1023.5 U2.E1@1600.51,1023.5 ; C11.2@1665,780 1665,899.02 U2.H4@1695,929.02
  Mid-Layer 2 w4: U2.E5@1726.5,1022.82 U2.E5@1726.5,1023.5
  Mid-Layer 2 w25: 1098,1590 1160,1590 1271,1701 ; C27.1@1379,1809 1271,1701 ; 1560,1338 C2.2@1560,1405 ; 1695,1368 1362,1701 1271,1701
  Bottom Layer w4: U2.G2@1630.51,960.51 U2.G2@1632.01,960.51 ; U2.E5@1726.5,1023.5 U2.D5@1726.5,1055 ; U2.G6@1757.99,960.51 U2.F6@1757.99,992.01
  Bottom Layer w8: C20.2@1640,845 1695,900 U2.H4@1695,929.02 ; U2.G6@1757.99,960.51 U2.G7@1789.49,960.51 ; 1980,1336 1981,1337 U6-ALT.FIN@2153,1337 2140.2,1324.2 U6.6@2140.2,1176.07 2140.2,1146.3 U6.V_6@2153,1133.5 ; R4.CW@2020,200 2176.72,200 2195,181.72 C26.1@2195,150
  Bottom Layer w25: R11.1@879.54,155 1078.67,354.13 1122.93,354.13 1144.12,375.33 1144.12,403.77 1341.35,601 v4(1446,601) ; R4.CW@2020,200 2020,259.24 1915.44,363.8 1915.44,416.84 2027.94,529.34 2027.94,698 ; 2026.72,697 2026.72,798.28 ; U6.V_2@2153,1102.5 U6.9@2153,1118 U6.V_6@2153,1133.5
  other v2: 1362,988
  other v3: 1801,542
DATA_CLK_OUT_A_N: J6.5 U2.C5 | length 1439.9
  Mid-Layer 1 w4.8: J6.5@599.78,1190.01 599.78,1183.52 624,1159.3 766.44,1159.3 994.87,930.87 1132.4,930.87 1273.83,1072.3 1348.5,1072.3 1348.5,1078.3 1366.3,1078.3 1366.3,1072.3 1408.5,1072.3 1408.5,1076.3 1418.1,1076.3 1418.1,1072.3 1427.7,1072.3 1427.7,1076.3 1437.3,1076.3 1437.3,1072.3 1446.9,1072.3 1446.9,1076.3 1456.5,1076.3 1456.5,1072.3 1466.1,1072.3 1466.1,1076.3 1475.7,1076.3 1475.7,1072.3 1485.3,1072.3 1485.3,1076.3 1494.9,1076.3 1494.9,1072.3 1504.5,1072.3 1504.5,1076.3 1514.1,1076.3 1514.1,1072.3 1530,1072.3 1546.97,1089.27 1544.14,1092.1 1550.93,1098.89 1553.76,1096.06 1574.12,1116.42 1571.3,1119.25 1578.08,1126.04 1580.91,1123.21 1595.7,1138 1610.1,1138 1610.1,1142 1619.7,1142 1619.7,1138 1636.8,1138 1636.8,1141 1646.4,1141 1646.4,1138 1683.34,1138 1714.9,1106.44 1714.9,1098.09 U2.C5@1726.5,1086.5
DATA_CLK_OUT_A_P: J6.4 U2.C4 | length 1439.4
  Mid-Layer 1 w4.8: J6.4@492.45,1180.99 522.45,1151 763,1151 989,925 991.43,922.57 1135.84,922.57 1277.27,1064 1533.44,1064 1599.14,1129.7 1679.9,1129.7 1706.6,1103 1706.6,1098.09 U2.C4@1695,1086.5
DTP: J5.6 U2.H8 | length 1139.7
  Top Layer w5: J5.6@1835,1985 1833.5,1983.5 1833.5,1589.5 v2(1928,1495)
  Mid-Layer 2 w8: U2.H8@1820.98,929.02 1927,1035.03 v2@1927,1495
EOS_A: J5.5 U1.6 | length 964.5
  Top Layer w8: U1.6@2100.75,1498.5 2140.72,1498.5 v2(2171.47,1529.25)
  Mid-Layer 2 w8: J5.5@1785,2085 1785,1633.72 1889.47,1529.25 v2(2171.47,1529.25)
EOS_A1: J1.4 U1.1 | length 1655.9
  Top Layer w8: J1.4@860,2085 934,2159 1764.07,2159 2065,1858.07 2065,1857.72 2088.72,1834 2088.72,1612 2100.75,1599.97 U1.1@2100.75,1577.24
EOS_A2: J2.4 U1.2 | length 1288.8
  Top Layer w8: v2(2060.72,1612) 2060.72,1592.69 2055,1586.97 2055,1571.22 2064.72,1561.5 U1.2@2100.75,1561.5
  Bottom Layer w8: J2.4@1150,2085 1355,1880 1945,1880 2060.72,1764.28 v2(2060.72,1612)
EOS_A3: J3.4 U1.9 | length 662.8
  Top Layer w8: J3.4@2295,2075 2380,1990 2380,1515 2363.5,1498.5 U1.9@2319.25,1498.5
EOS_A4: J4.4 U1.10 | length 969.1
  Top Layer w8: U1.10@2319.25,1514.25 2270.25,1514.25 2253,1497 2253,1473 2272,1454 2432.72,1454 2455.72,1477 2455.72,1945.72 J4.4@2585,2075
FRAME_CLK_OUT_A_N: J6.1 U2.C2 | length 1482.4
  Top Layer w4.25: 1584.75,1094.11 1592.77,1102.12 1616.38,1102.12 U2.C2@1632.01,1086.5
  Top Layer w6.05: J6.1@553,1037 546,1044 501,1044 480.11,1023.11 480.11,998.11 523.22,954.99 643.53,954.99 643.53,1000.98 cw(c648.55,1000.98) 648.55,1006 681.65,1006 cw(c681.65,1000.98) 686.68,1000.98 686.67,954.99 1168.99,954.99 1354.08,1140.07 1501.14,1140.07 1547.11,1094.11 1584.75,1094.11
FRAME_CLK_OUT_A_P: J6.2 U2.C1 | length 1481.9
  Top Layer w6.05: J6.2@469.06,1104.49 493.89,1079.66 493.89,1051.11 470.06,1027.27 470.06,993.94 519.06,944.94 648.55,944.94 ccw(c648.55,949.97) 653.58,949.97 653.58,995.95 676.62,995.95 676.62,949.97 ccw(c681.65,949.97) 681.65,944.94 1173.16,944.94 1358.24,1130.03 1427.83,1130.03 1427.83,1127.03 1443.88,1127.03 1443.88,1130.03 1496.98,1130.03 1542.94,1084.06 1598.07,1084.06 U2.C1@1600.51,1086.5
GND: "Test Point 1.1" "Test Point 2.1" C1.1 C4.2 C6.1 C8.1 C13.2 C15.2 C16.2 C22.1 J1.1 J2.1 J3.1 J4.1 J6.MH3 J6.MH4 J7.MH3 J7.MH4 J8.7 J8.8 J8.9 J9.7 J9.8 J9.9 J10.7 J10.8 J10.9 J11.7 J11.8 J11.9 J12.1 J12.2 R11.2 U1.7 U1.12 U1.13 U2.D3 U2.D6 U3.6 U3.9 U3.21 U4.6 U4.9 U4.21 U5-ALT.FIN U5.6 U5.9 U5.V_1 U5.V_2 U5.V_3 U5.V_4 U5.V_5 U5.V_6 U7.3 | length 1329.7
  Top Layer w5: U1.7@2100,1482.01 U1.7@2100.75,1482.76
  Top Layer w8: U7.3@2180.35,1980.59 v2@2180.35,2012.65 ; v2(2255,1560) 2256.5,1561.5 U1.13@2318.72,1561.5 ; U1.12@2319.25,1545.75 2318.72,1545.75 U1.13@2318.72,1561.5 ; U1.13@2319.25,1561.5 U1.13@2318.72,1561.5
  Top Layer w20: R11.2@946.46,155 947.46,156 1066,156 1262,156 J12.1@1264,158 J12.2@1364,158 ; 1065,158 1066,159
  Mid-Layer 2 w25: J1.1@860,1785 J2.1@1150,1785 ; J3.1@2295,1775 J4.1@2585,1775
  Bottom Layer w8: U5.V_6@1167,1224.5 1179.8,1211.7 U5.6@1179.8,1181.93 1179.8,1029.8 U5-ALT.FIN@1169,1019
  other v2: 844,546 937,696 2180,2013
  other v3: 1325,452 1839,546 1726,561 1808,723 2571,949 1534,965 2619,1252 2469,1309
HVCCA/2: "R10 - Bias.W" C27.2 J1.3 J2.3 J3.3 J4.3 | length 2290.6
  Mid-Layer 1 w8: J1.3@860,1985 J2.3@1150,1985 1168.5,1966.5 1292,1966.5 ; 1198,1490 1266.5,1558.5 1266.5,1786.5 C27.2@1289,1809 1289,1963.5 1292,1966.5 ; J4.3@2585,1975 J3.3@2295,1975 2093.25,1975 2046.22,2022.03 1619.66,2022.03 1564.14,1966.5 1292,1966.5
LVDS_CHANNEL_1_N: J7.2 U2.A1 | length 1486.4
  Top Layer w6.05: U2.A1@1600.51,1149.49 1606.41,1155.38 1606.09,1155.7 1606.09,1181.09 1815.11,1390.11 2683.89,1390.11 2715.84,1422.05 2823.64,1422.05 2850.53,1395.16 2850.53,1366.47 2886.28,1330.72 J7.2@2903.89,1330.72
LVDS_CHANNEL_1_P: J7.1 U2.B1 | length 1486.5
  Top Layer w4.25: U2.B1@1600.51,1117.99 1616.14,1133.62 1616.14,1159.86
  Top Layer w6.05: 1616.14,1159.86 1616.14,1176.92 1723.84,1284.63 1727.38,1281.09 1745.8,1299.51 1742.26,1303.05 1819.27,1380.06 2688.06,1380.06 2720,1412 2819.47,1412 2840.47,1391 2840.47,1364.47 2815.73,1339.73 J7.1@2796.56,1339.73
LVDS_CHANNEL_2_N: J7.6 U2.A3 | length 1484.1
  Top Layer w6.05: U2.A3@1663.5,1149.49 1663.5,1163 1669.08,1168.57 1669.08,1175.29 1775.84,1282.05 2787.08,1282.05 2804.81,1299.78 2835.09,1299.78 2844.11,1290.77 2942.42,1290.77 2963.83,1269.35 2963.83,1190.87 J7.6@2950.67,1177.71
LVDS_CHANNEL_2_P: J7.3 U2.B3 | length 1485.9
  Top Layer w4.25: U2.B3@1663.5,1117.99 1679.13,1133.62 1679.13,1157.87
  Top Layer w6.05: 1679.13,1157.87 1679.13,1171.13 1691.96,1183.96 1695.5,1180.43 1704.05,1188.98 1700.52,1192.52 1709.07,1201.07 1712.61,1197.54 1721.17,1206.1 1717.63,1209.63 1726.19,1218.19 1729.72,1214.65 1738.28,1223.21 1734.74,1226.74 1743.3,1235.3 1746.83,1231.76 1755.39,1240.32 1751.85,1243.85 1760.41,1252.41 1763.95,1248.88 1772.5,1257.43 1768.97,1260.97 1780,1272 1810.25,1272 1810.25,1267 1822.35,1267 1822.35,1272 1834.45,1272 1834.45,1267 1846.55,1267 1846.55,1272 1858.65,1272 1858.65,1267 1870.75,1267 1870.75,1272 1882.85,1272 1882.85,1267 1894.95,1267 1894.95,1272 1907.05,1272 1907.05,1267 1919.15,1267 1919.15,1272 1931.25,1272 1931.25,1267 1943.35,1267 1943.35,1272 1964.43,1272 1964.43,1267 1978.48,1267 1978.48,1272 1992.53,1272 1992.53,1267 2006.58,1267 2006.58,1272 2020.63,1272 2020.63,1267 2034.68,1267 2034.68,1272 2048.73,1272 2048.73,1267 2062.78,1267 2062.78,1272 2076.83,1272 2076.83,1267 2090.88,1267 2090.88,1272 2104.93,1272 2104.93,1267 2118.98,1267 2118.98,1272 2133.03,1272 2133.03,1267 2147.08,1267 2147.08,1272 2161.13,1272 2161.13,1267 2175.18,1267 2175.18,1272 2189.23,1272 2189.23,1267 2203.28,1267 2203.28,1272 2217.33,1272 2217.33,1267 2231.38,1267 2231.38,1272 2245.43,1272 2245.43,1267 2259.48,1267 2259.48,1272 2273.53,1272 2273.53,1267 2287.58,1267 2287.58,1272 2301.63,1272 2301.63,1267 2315.68,1267 2315.68,1272 2811.18,1272 J7.3@2819.95,1263.23
LVDS_CHANNEL_3_N: J7.4 U2.A5 | length 1484.7
  Top Layer w6.05: U2.A5@1726.5,1149.49 1726.5,1161.71 1797.84,1233.05 2215.65,1233.05 cw(c2215.65,1228.03) 2220.68,1228.03 2220.68,1197.05 2239.72,1197.05 2239.72,1228.03 cw(c2244.75,1228.03) 2244.75,1233.05 2273.85,1233.05 cw(c2273.85,1228.03) 2278.88,1228.03 2278.88,1197.05 2297.93,1197.05 2297.93,1228.03 cw(c2302.95,1228.03) 2302.95,1233.05 2332.05,1233.05 cw(c2332.05,1228.03) 2337.08,1228.03 2337.08,1197.05 2356.12,1197.05 2356.12,1228.03 cw(c2361.15,1228.03) 2361.15,1233.05 2398.53,1233.05 2398.53,1242.03 cw(c2403.55,1242.03) 2403.55,1247.05 2432.65,1247.05 cw(c2432.65,1242.03) 2437.68,1242.03 2437.68,1233.05 2660,1233.05 2668,1225.05 2898.12,1225.05 J7.4@2927.28,1254.21
LVDS_CHANNEL_3_P: J7.5 U2.B5 | length 1485.5
  Top Layer w4.25: U2.B5@1726.5,1117.99 1742.12,1133.62 1742.12,1162.88 1742,1163
  Top Layer w6.05: 1742,1163 1767.83,1188.83 1774.2,1182.47 1782.75,1191.03 1776.39,1197.39 1784.95,1205.95 1791.31,1199.58 1799.87,1208.14 1793.5,1214.5 1802,1223 1820.15,1223 1820.15,1214 1832.25,1214 1832.25,1223 1909.58,1223 1909.58,1217 1928.62,1217 1928.62,1223 2210.62,1223 2210.62,1192.03 ccw(c2215.65,1192.03) 2215.65,1187 2244.75,1187 ccw(c2244.75,1192.03) 2249.78,1192.03 2249.78,1223 2268.83,1223 2268.83,1192.03 ccw(c2273.85,1192.03) 2273.85,1187 2302.95,1187 ccw(c2302.95,1192.03) 2307.98,1192.03 2307.97,1223 2327.03,1223 2327.03,1192.03 ccw(c2332.05,1192.03) 2332.05,1187 2361.15,1187 ccw(c2361.15,1192.03) 2366.18,1192.03 2366.18,1223 2403.55,1223 ccw(c2403.55,1228.03) 2408.58,1228.03 2408.58,1237 2427.62,1237 2427.62,1228.03 ccw(c2432.65,1228.03) 2432.65,1223 2655.84,1223 2663.84,1215 2815.07,1215 J7.5@2843.34,1186.72